# Altium PCB 2_way_splitter.PcbDoc
Units mm, origin at the board's own origin, x right, y up, seen from the top; angles counter-clockwise.
Board outline 10.53 x 12.88 mm, 2 copper layers (Top Layer, Bottom Layer); 4 components, 2 nets, 8 pads, 0 vias.
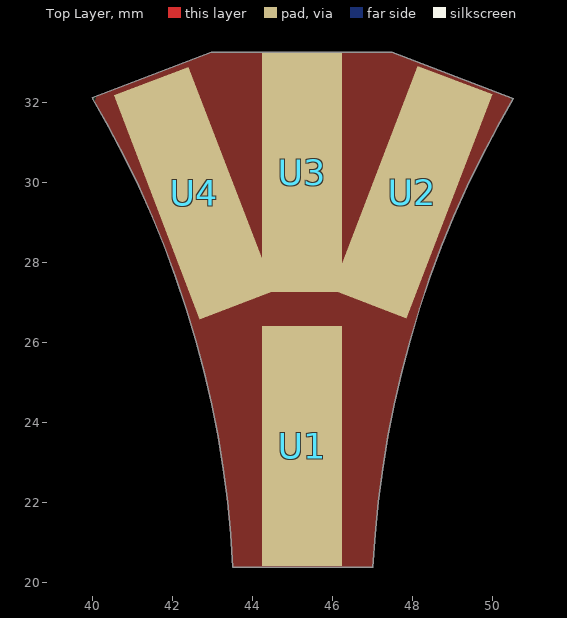
[diagram p0: Top Layer view]
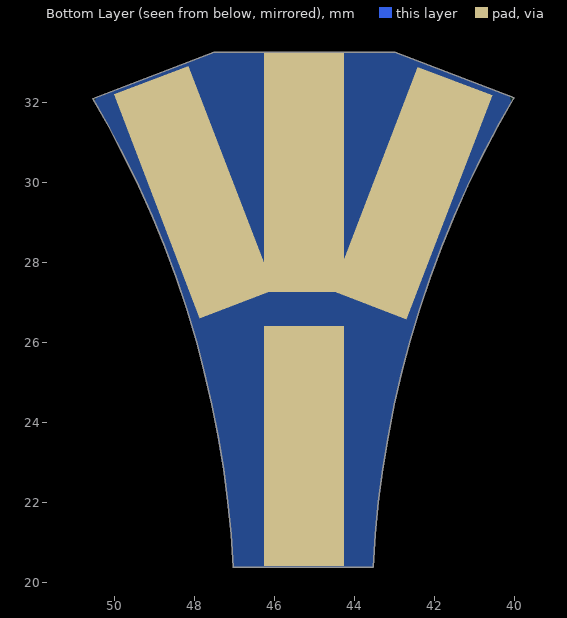
[diagram p1: Bottom Layer view, seen from below]

## Layer stack, top to bottom
Top Solder: solder mask 0.0102, Solder Resist, Dk 3.5
Top Layer: signal copper 0.0356
Dielectric 1: dielectric 0.32, FR-4, Dk 4.8
Bottom Layer: signal copper 0.0356
Bottom Solder: solder mask 0.0102, Solder Resist, Dk 3.5

## Board outline
43.523,20.369 ccw(c18.054,19.123) 40.012,32.086 40.004,32.107 42.98,33.25 45.23,33.25 45.25,33.25 47.5,33.25 50.533,32.086 ccw(c72.491,19.123) 47.023,20.369

## Design rules (kind name [scope] priority, off if disabled: settings)
Clearance [All] p1: gap=0.254 ignorepadtopadclearanceinfootprint=FALSE except(0: Arc-Hole Track-Hole SMDPad-Hole THPad-Hole Via-Hole Fill-Hole Poly-Hole Region-Hole Text-Hole)
PolygonConnect [All] p1: connectstyle=Relief reliefconductorwidth=0.254 reliefentries=4 polygonreliefangle="90 Angle" airgapwidth=0.254
RoutingVias [All] p1: holewidth=0.711 width=1.27 viastyle="Through Hole" minholewidth=0.711 minwidth=1.27 maxholewidth=0.711 maxwidth=1.27
SolderMaskExpansion [All] p1: expansion=0.102 istentingtop=FALSE
Width [All] p1: maxlimit=0.254 minlimit=0.254 preferedwidth=0.254
30 further rules are at their usual default settings.

## Classes and differential pairs
component class 2_way_splitter: U1 U2 U3

## Components (designator, comment, footprint, x,y, rotation, side; value= is the part's Value field where it differs from the comment)
U1 "dual_side_pad" dual_side_pad 45.25,23.4 r0 top
U2 "dual_side_pad" dual_side_pad 48,29.75 r339 top
U3 "dual_side_pad" dual_side_pad 45.25,30.25 r0 top
U4 "dual_side_pad" dual_side_pad 42.55,29.725 r21 top

## Footprints (in the part's own frame and the unit in brackets; to place one, negate y for a bottom-side part, rotate by r counter-clockwise, add the part's x,y. Pads: shape width x height; smd on the part's side, far side on the other; paste and mask are expansions set on the pad)
dual_side_pad [mm]
  rect 2x6 smd mask+0.05: 0(0,0)
  rect 2x6 smd far side mask+0.05: 1(0,0)

## Nets (pads, with @x,y where several pads share a name; then routed paths per layer and width w, separated by ;. In a path a pad name is that pad's centre, name@x,y a point inside that pad or via, vN(x,y) a via of type N, cw(c..) or ccw(c..) an arc to the next point about the centre after c; other vN are vias at no path point)
GND: U1.0 U2.0 U3.0 U4.0
VCC: U1.1 U2.1 U3.1 U4.1

## Polygon pours and split planes (outlines as drawn)
GND on Top Layer "Top Layer-No Net" (solid, pour order 0): 43.523,20.369 ccw(c18.054,19.123) 40.012,32.086 40.004,32.107 42.98,33.25 45.23,33.25 45.25,33.25 47.5,33.25 50.533,32.086 ccw(c72.491,19.123) 47.023,20.369
VCC on Bottom Layer "Top Layer-No Net1" (solid, pour order 1): 43.523,20.369 ccw(c18.054,19.123) 40.012,32.086 40.004,32.107 42.98,33.25 45.23,33.25 45.25,33.25 47.5,33.25 50.533,32.086 ccw(c72.491,19.123) 47.023,20.369

## Silkscreen, mask and mechanical layers (free items; w line width, h text height)
Mechanical 2:
  lines w0.158: 40.012,32.086 cw(c18.054,19.123) 43.523,20.369 ; 47.023,20.369 cw(c72.491,19.123) 50.533,32.086
  lines w0.2: 40.004,32.107 42.98,33.25 45.23,33.25 ; 43.523,20.369 47.023,20.369 ; 45.25,33.25 47.5,33.25 50.533,32.086